# Altium PCB Room02.PcbDoc
Units mil, origin at the board's own origin, x right, y up, seen from the top; angles counter-clockwise.
Board outline 3779.53 x 3149.61 mil, 2 copper layers (Top Layer, Bottom Layer); 97 components, 89 nets, 403 pads, 109 vias.
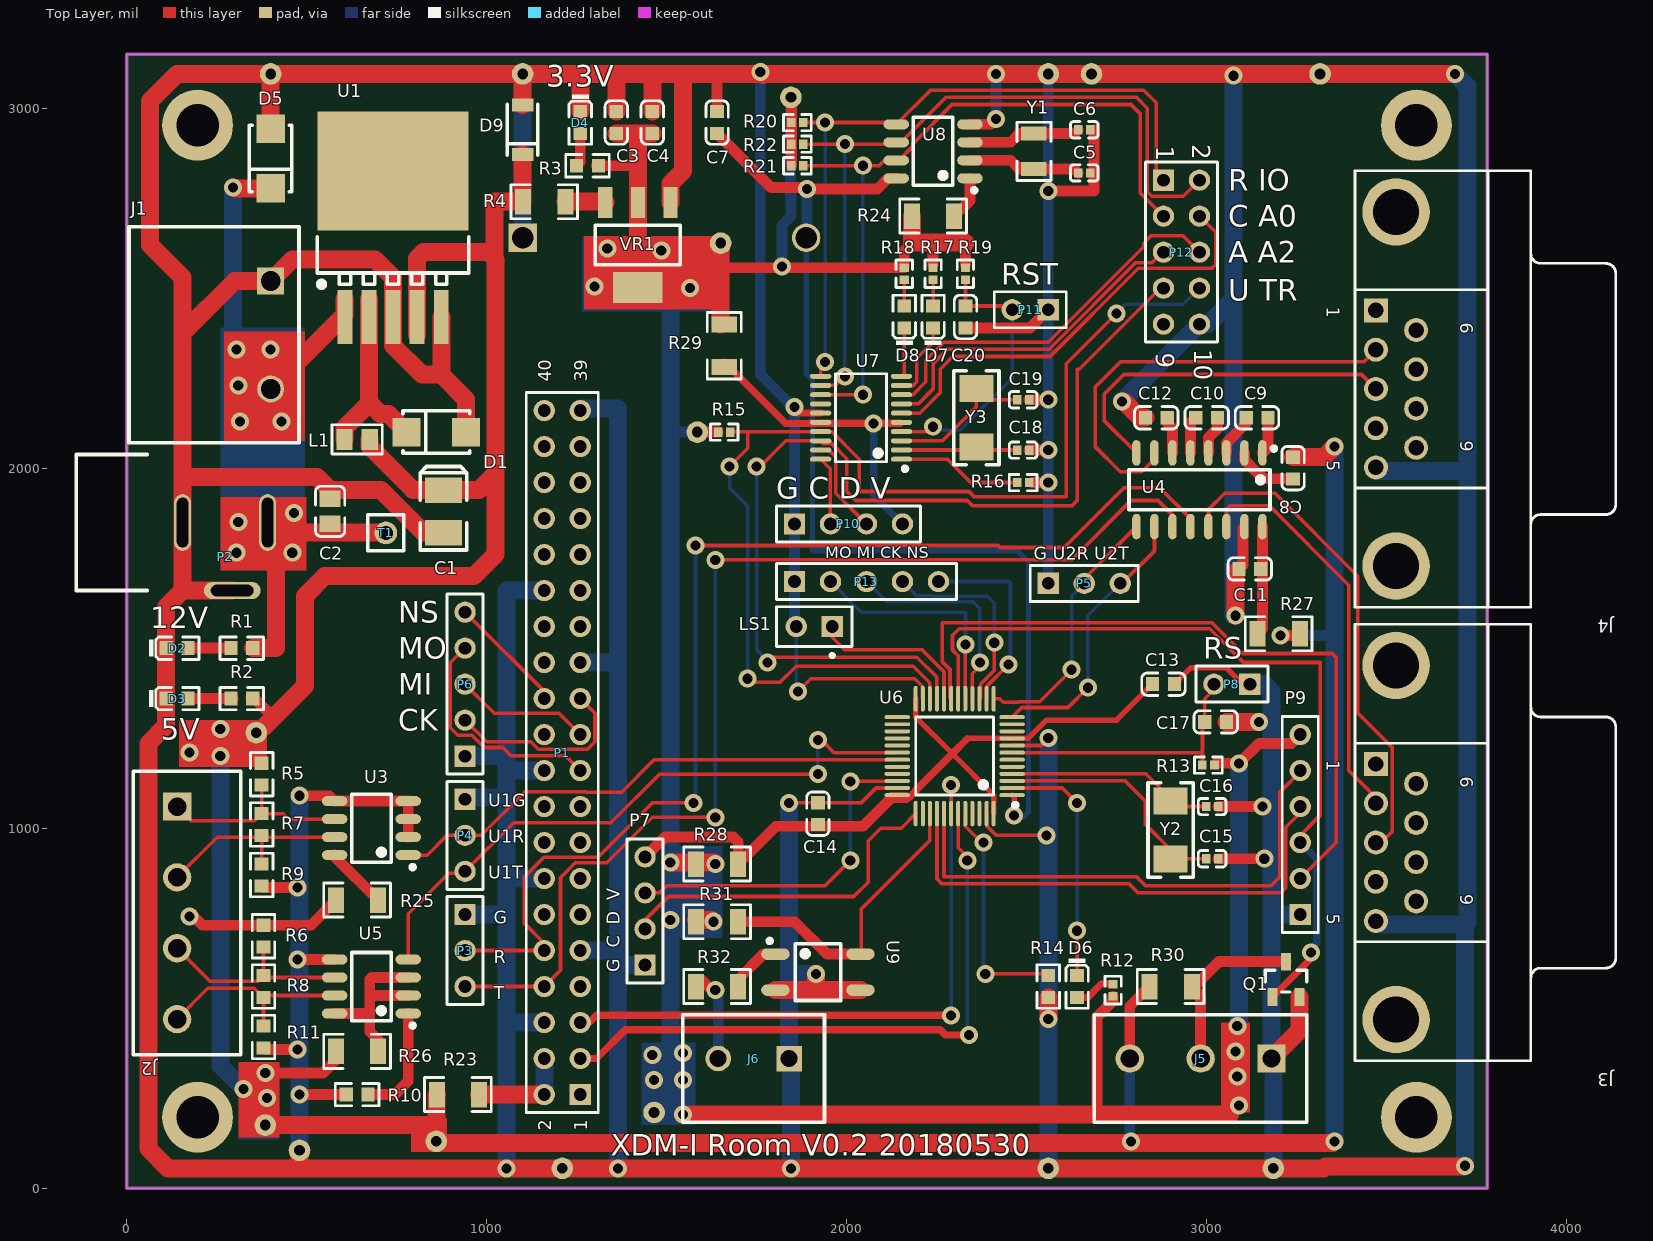
[diagram p0: Top Layer view]
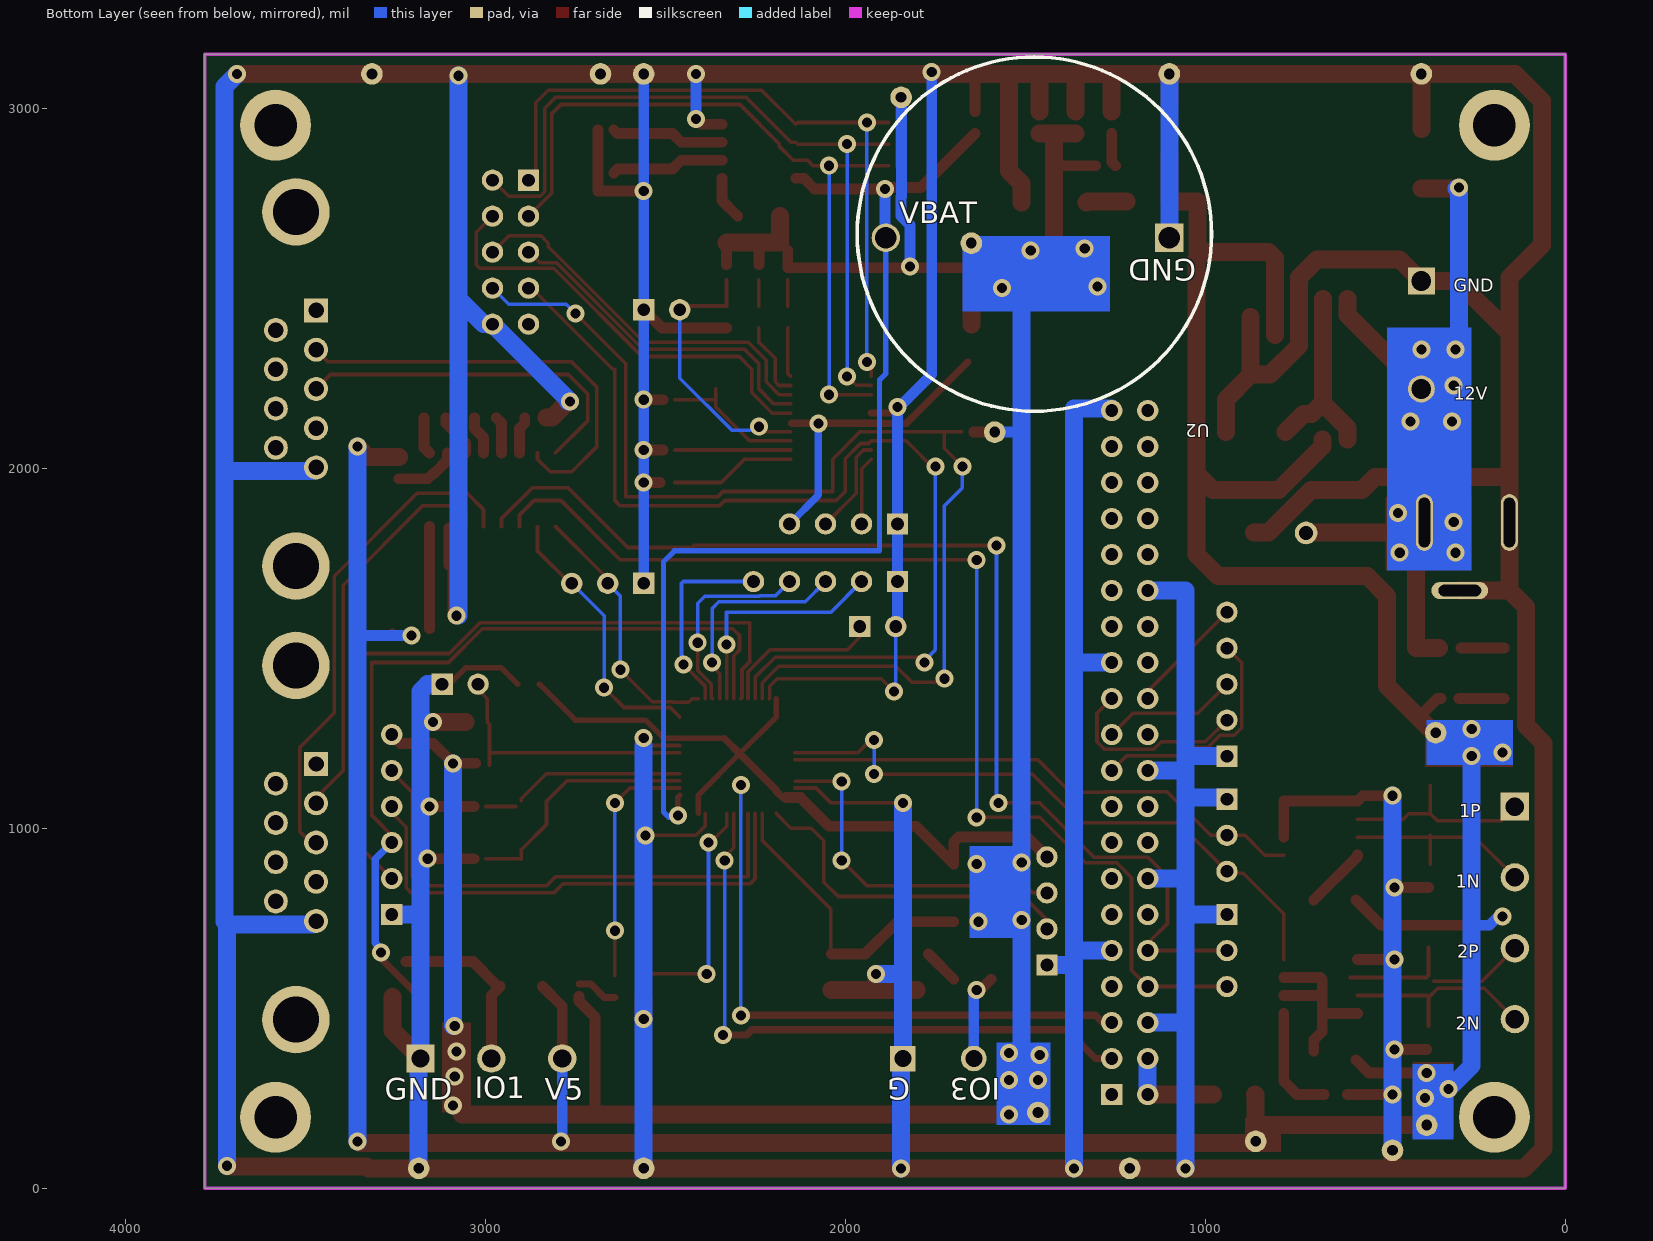
[diagram p1: Bottom Layer view, seen from below]
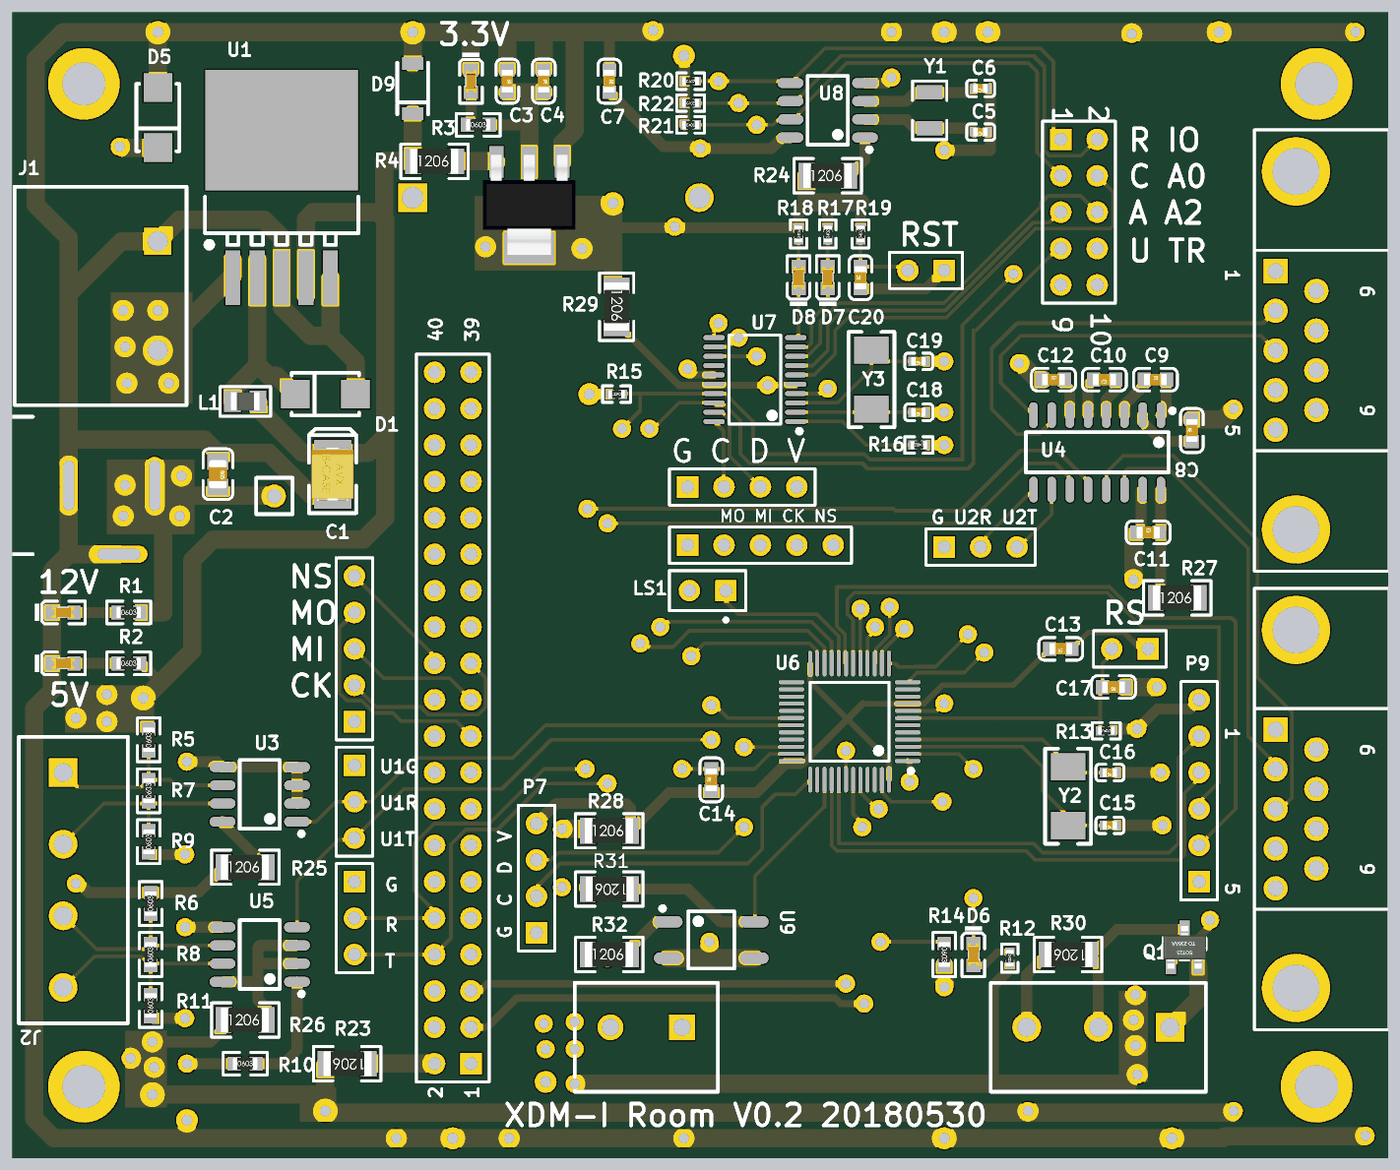
[diagram p2: 3D render of the assembled board from above, using the file's embedded part models]

## Layer stack, top to bottom
Top Layer: signal copper 1.4
Dielectric: dielectric 12.6, FR-4, Dk 4.8
Bottom Layer: signal copper 1.4

## Board outline
0,0 0,3149.61 3779.53,3149.61 3779.53,0

## Design rules (kind name [scope] priority, off if disabled: settings)
Clearance [All] p1: gap=6
DiffPairsRouting [All] p1: maxlimit=10 minlimit=10 mostfreqgap=10 maxuncoupledlength=500
HoleSize [All] p1: absolutevalues=TRUE maxlimit=236.22 minlimit=11.81 maxpercent=80.000 minpercent=20.000
MinimumSolderMaskSliver [All] p1: minsoldermaskwidth=6
PolygonConnect [All] p1: connectstyle=Relief reliefconductorwidth=10 reliefentries=4 polygonreliefangle="90 Angle"
RoutingVias [All] p1: holewidth=28 width=50 viastyle="Through Hole" minholewidth=28 minwidth=50 maxholewidth=28 maxwidth=50
SilkToSilkClearance [All] p1: silktosilkclearance=6
SilkscreenOverComponentPads [All] p1: minsilkscreentomaskgap=3
SolderMaskExpansion [All] p1: expansion=4
Width Width_V3.3 [InNet('V3.3')] p1: maxlimit=50 minlimit=10 preferedwidth=10
Width Width_V5 [InNet('V5')] p2: maxlimit=50 minlimit=10 preferedwidth=50
Width Width_GND [InNet('GND')] p3: maxlimit=50 minlimit=10 preferedwidth=50
Width [All] p4: maxlimit=50 minlimit=10 preferedwidth=10
23 further rules are at their usual default settings.

## Classes and differential pairs
component class mcu: C13 C14 C15 C16 C17 C18 C19 C20 D6 D7 D8 P5 P7 P8 P9 P10 P11 P12 P13 R12 R13 R14 R15 R16 R17 R18 R19 R28 R29 U6 U7 Y2 Y3
component class commu: C8 C9 C10 C11 C12 J2 J3 J4 P4 R5 R6 R7 R8 R9 R10 R11 R25 R26 R27 U3 U4 U5
component class Power: C1 C2 C3 C4 C7 D1 D2 D3 D4 D5 D9 J1 L1 P2 R1 R2 R3 R4 T1 U1 U2 VR1
component class other: C5 C6 J5 J6 LS1 Q1 R20 R21 R22 R24 R30 R31 R32 U8 U9 Y1
component class raspi: P1 P3 P6 R23
differential pair CON2: +CON2_P -CON2_N
differential pair CON1: +CON1_P -CON1_N

## Components (designator, comment, footprint, x,y, rotation, side; value= is the part's Value field where it differs from the comment)
C1 "100uF (107) ±10% 6.3V" CASE-B_3528 880,1880 r90 top
C2 "22uF (226) 20% 25V" 0805_C 565,1880 r270 top
C3 "10uF (106) 10% 10V" 0603_C 1360,2960 r270 top
C4 "100nF (104) 10% 50V" 0603_C 1460,2960 r270 top
C5 "12pF (120) 5% 50V" 0402_C 2660,2820 r180 top
C6 "12pF (120) 5% 50V" 0402_C 2660,2940 r180 top
C7 "10uF (106) 10% 10V" 0603_C 1640,2960 r270 top
C8 "1uF (105) 10% 50V" 0603_C 3240,2000 r90 top
C9 "1uF (105) 10% 50V" 0603_C 3140,2140 r0 top
C10 "1uF (105) 10% 50V" 0603_C 3000,2140 r180 top
C11 "1uF (105) 10% 50V" 0603_C 3120,1720 r0 top
C12 "1uF (105) 10% 50V" 0603_C 2860,2140 r0 top
C13 "100nF (104) 10% 50V" 0603_C 2880,1400 r180 top
C14 "10uF (106) 10% 10V" 0603_C 1920,1040 r90 top
C15 "20pF (200) 5% 50V" 0402_C 3015,915 r180 top
C16 "20pF (200) 5% 50V" 0402_C 3015,1060 r180 top
C17 "10uF (106) 10% 10V" 0603_C 3025,1295 r180 top
C18 "20pF (200) 5% 50V" 0402_C 2490,2050 r180 top
C19 "20pF (200) 5% 50V" 0402_C 2490,2190 r180 top
C20 "10uF (106) 10% 10V" 0603_C 2330,2420 r90 top
D1 "SS54" SMA(DO-214AC)_S1 860,2100 r0 top
D2 "绿灯 0603" 0603_LED_S1 140,1500 r0 top
D3 "蓝灯 0603" 0603_LED_S1 140,1360 r0 top
D4 "白灯 0603" 0603_LED_S1 1260,2960 r270 top
D5 "SS54" SMA(DO-214AC)_S1 400,2860 r90 top
D6 "蓝灯 0603" 0603_LED_S1 2640,560 r270 top
D7 "蓝灯 0603" 0603_LED_S1 2240,2420 r90 top
D8 "红灯 0603" 0603_LED_S1 2160,2420 r90 top
D9 "ZMM5V6" LL-34 1100,2940 r90 top
J1 "XK7.62-2P" XK7.62-2P 400,2520 r0 top
J2 "KF301-4P" KF301-4P 140,1060 r270 top
J3 "D Connector 9" DSUB1.385-2H9 3900,960 r270 top
J4 "D Connector 9" DSUB1.385-2H9 3900,2220 r270 top
J5 "KF301-3P" KF301-3P 3180,360 r180 top
J6 "KF301-2P" KF301-2P 1840,360 r180 top
L1 "100uH ±10%" 0805_L 640,2080 r0 top
LS1 "Bell" PIN2 1960,1560 r180 top
P1 "Header 20X2" HDR2X20 1260,260 r90 top
P2 "Header 3" DC005 -140,1660 r0 top
P3 "Header 3" HDR1X3 940,760 r270 top
P4 "Header 3" HDR1X3 940,1080 r270 top
P5 "Header 3" HDR1X3 2560,1680 r0 top
P6 "Header 5" HDR1X5 940,1200 r90 top
P7 "Header 4" HDR1X4 1440,620 r90 top
P8 "Header 2" HDR1X2 3120,1400 r180 top
P9 "Header 6" HDR1X6 3260,760 r90 top
P10 "Header 4" HDR1X4 1855,1845 r0 top
P11 "Header 2" HDR1X2 2560,2440 r180 top
P12 "Header 5X2" HDR2X5 2880,2800 r270 top
P13 "Header 5" HDR1X5 1855,1685 r0 top
Q1 "2N7002 7002" SOT-23(SOT-23-3) 3220,580 r270 top
R1 "20KΩ (2002) ±1%" 0603_R 320,1500 r0 top
R2 "10KΩ (1002) ±1%" 0603_R 320,1360 r0 top
R3 "10KΩ (1002) ±1%" 0603_R 1280,2840 r0 top
R4 "0Ω (0R0) ±1%" 1206_R 1160,2740 r0 top
R5 "10KΩ (1002) ±1%" 0603_R 375,1150 r90 top
R6 "10KΩ (1002) ±1%" 0603_R 380,700 r90 top
R7 "120Ω (1200) ±1%" 0603_R 375,1010 r90 top
R8 "120Ω (1200) ±1%" 0603_R 380,560 r90 top
R9 "10KΩ (1002) ±1%" 0603_R 375,870 r90 top
R10 "10KΩ (1002) ±1%" 0603_R 640,260 r0 top
R11 "10KΩ (1002) ±1%" 0603_R 380,420 r90 top
R12 "10KΩ (1002) ±1%" 0402_R 2740,550 r270 top
R13 "10KΩ (1002) ±1%" 0402_R 3005,1175 r0 top
R14 "100KΩ (1003) ±1%" 0603_R 2560,560 r270 top
R15 "100KΩ (1003) ±1%" 0402_R 1660,2100 r180 top
R16 "100KΩ (1003) ±1%" 0402_R 2490,1960 r180 top
R17 "10KΩ (1002) ±1%" 0402_R 2240,2540 r90 top
R18 "10KΩ (1002) ±1%" 0402_R 2160,2540 r90 top
R19 "10KΩ (1002) ±1%" 0402_R 2330,2540 r90 top
R20 "10KΩ (1002) ±1%" 0402_R 1863.27,2960 r0 top
R21 "10KΩ (1002) ±1%" 0402_R 1863.27,2840 r0 top
R22 "10KΩ (1002) ±1%" 0402_R 1863.27,2900 r0 top
R23 "0Ω (0R0) ±1%" 1206_R 920,260 r180 top
R24 "0Ω (0R0) ±1%" 1206_R 2240,2700 r0 top
R25 "0Ω (0R0) ±1%" 1206_R 640,800 r0 top
R26 "0Ω (0R0) ±1%" 1206_R 640,380 r0 top
R27 "0Ω (0R0) ±1%" 1206_R 3200,1540 r0 top
R28 "0Ω (0R0) ±1%" 1206_R 1640,900 r0 top
R29 "0Ω (0R0) ±1%" 1206_R 1660,2340 r270 top
R30 "10KΩ (1002) ±1%" 1206_R 2900,560 r180 top
R31 "10KΩ (1002) ±1%" 1206_R 1640,740 r180 top
R32 "1KΩ (1001) ±1%" 1206_R 1640,560 r0 top
T1 "TP1" TP1 720,1820 r0 top
U1 "LM2576SX-5.0" TO-263-5 740,2420 r270 top
U2 "BAT" BAT2032 1100,2640 r0 bottom
U3 "SN75176BDR" SOIC-8_150mil 680,1000 r90 top
U4 "MAX232ESE" SOIC-16_150mil 2980,1940 r180 top
U5 "SN75176BDR" SOIC-8_150mil 680,560 r90 top
U6 "STM32F103C8T6" LQFP-48_7x7x05P 2300,1200 r90 top
U7 "STM32F030F4P6" TSSOP-20 2040,2140 r90 top
U8 "DS1302Z+T&R" SOIC-8_150mil 2240,2880 r90 top
U9 "EL357N(B)(TA)-G" SOP-4_P2.54 1920,600 r0 top
VR1 "AMS1117-3.3" SOT-223 1420,2620 r90 top
Y1 "32.768KHz ±20ppm 12.5pF" "SMD-3215_2P FC - 135" 2520,2880 r90 top
Y2 "8MHz ±20ppm 20pF" SMD-5032_2P 2900,995 r90 top
Y3 "8MHz ±20ppm 20pF" SMD-5032_2P 2360,2140 r90 top

## Footprints (in the part's own frame and the unit in brackets; to place one, negate y for a bottom-side part, rotate by r counter-clockwise, add the part's x,y. Pads: shape width x height; smd on the part's side, far side on the other; paste and mask are expansions set on the pad)
0402_C [mm]
  rect 0.6x0.65 smd mask+0.051: 1(-0.425,0) 2(0.425,0)
  silkscreen extent -0.98,-0.58 0.98,0.58, body extent -0.48,-0.3 0.52,0.3, height 0.2
0402_R [mm]
  rect 0.6x0.65 smd mask+0.051: 1(-0.425,0) 2(0.425,0)
  silkscreen extent -0.98,-0.58 0.98,0.58, body extent -0.57,-0.27 0.58,0.28, height 0.41
0603_C [mm]
  rect 0.93x0.98 smd: 1(-0.77,0) 2(0.77,0)
  silkscreen extent -1.54,-0.79 1.54,0.79, body extent -0.8,-0.4 0.8,0.4, height 0.3
0603_LED_S1 [mm]
  rect 0.93x0.98 smd: A(0.77,0) K(-0.77,0)
  silkscreen extent -1.98,-0.79 1.54,0.79, body extent -0.8,-0.4 0.8,0.4, height 0.6
0603_R [mm]
  rect 0.93x0.98 smd: 1(-0.77,0) 2(0.77,0)
  silkscreen extent -1.53,-0.79 1.54,0.79, body extent -0.85,-0.4 0.85,0.4, height 0.56
0805_C [mm]
  rect 1.16x1.47 smd: 1(-0.89,0) 2(0.89,0)
  silkscreen extent -1.77,-1.04 1.77,1.04, body extent -1,-0.63 1,0.63, height 0.77
0805_L [mm]
  rect 1.16x1.47 smd: 1(-0.89,0) 2(0.89,0)
  silkscreen extent -1.77,-1.03 1.77,1.03, body extent -1.02,-0.64 1.03,0.64, height 0.6
1206_R [mm]
  rect 1.13x1.8 smd: 1(-1.49,0) 2(1.49,0)
  silkscreen extent -2.35,-1.2 2.35,1.2, body extent -1.7,-0.86 1.65,0.87, height 0.85
BAT2032 [mm]
  rect 2x2 hole 1.5: 1(0,0)
  round 2 hole 1.5: 2(20,0)
  silkscreen extent -2.97,-12.75 22.02,12.24
CASE-B_3528 [mm]
  rect 1.8x2.6 smd: 1(1.5,0) 2(-1.5,0)
  silkscreen extent -2.73,-1.65 3.16,1.65, body extent -1.85,-1.47 1.85,1.46, height 2.03
DC005 [mm]
  oval 1.2x4 hole 0.8 slot 3.5 at 90 deg: 1(13.5,4.8) 3(7.5,4.8)
  oval 4x1.2 hole 0.8 slot 3 at 0 deg: 2(11,0)
  silkscreen extent 0,0 5,9.6
DSUB1.385-2H9 [mm] "Connector; D Subminiature; 9 Position; Right Angle; Pitch 1.385 mm"
  rect 1.69x1.69 hole 1.09: 1(-5.54,-10.92)
  round 1.69 hole 1.09: 2(-2.77,-10.92) 3(0,-10.92) 4(2.77,-10.92) 5(5.54,-10.92) 6(-4.155,-8.08) 7(-1.385,-8.08) 8(1.385,-8.08) 9(4.155,-8.08)
  round 4.76 hole 3.26: 10(-12.495,-9.5) 11(12.495,-9.5)
  silkscreen extent -15.4,-12.4 15.4,6
HDR1X2 [mm] "Connector; Header; 2 Position"
  rect 1.5x1.5 hole 0.9: 1(0,0)
  round 1.5 hole 0.9: 2(2.54,0)
  silkscreen extent -1.27,-1.27 3.81,1.27
HDR1X3 [mm] "Connector; Header; 3 Position"
  rect 1.5x1.5 hole 0.9: 1(0,0)
  round 1.5 hole 0.9: 2(2.54,0) 3(5.08,0)
  silkscreen extent -1.27,-1.27 6.35,1.27
HDR1X4 [mm] "Connector; Header; 4 Position"
  rect 1.5x1.5 hole 0.9: 1(0,0)
  round 1.5 hole 0.9: 2(2.54,0) 3(5.08,0) 4(7.62,0)
  silkscreen extent -1.27,-1.27 8.89,1.27
HDR1X5 [mm] "Connector; Header; 5 Position"
  rect 1.5x1.5 hole 0.9: 1(0,0)
  round 1.5 hole 0.9: 2(2.54,0) 3(5.08,0) 4(7.62,0) 5(10.16,0)
  silkscreen extent -1.27,-1.27 11.43,1.27
HDR1X6 [mm] "Connector; Header; 6 Position"
  rect 1.5x1.5 hole 0.9: 1(0,0)
  round 1.5 hole 0.9: 2(2.54,0) 3(5.08,0) 4(7.62,0) 5(10.16,0) 6(12.7,0)
  silkscreen extent -1.27,-1.27 13.97,1.27
HDR2X5 [mm] "Connector; Header; 5x2 Position"
  rect 1.5x1.5 hole 0.9: 1(0,0)
  round 1.5 hole 0.9: 2(0,2.54) 3(2.54,0) 4(2.54,2.54) 5(5.08,0) 6(5.08,2.54) 7(7.62,0) 8(7.62,2.54) 9(10.16,0) 10(10.16,2.54)
  silkscreen extent -1.27,-1.27 11.43,3.81
HDR2X20 [mm] "Connector; Header; 20x2 Position"
  rect 1.5x1.5 hole 0.9: 1(0,0)
  round 1.5 hole 0.9: 2(0,2.54) 3(2.54,0) 4(2.54,2.54) 5(5.08,0) 6(5.08,2.54) 7(7.62,0) 8(7.62,2.54) 9(10.16,0) 10(10.16,2.54) 11(12.7,0) 12(12.7,2.54) 13(15.24,0) 14(15.24,2.54) 15(17.78,0) 16(17.78,2.54) 17(20.32,0) 18(20.32,2.54) 19(22.86,0) 20(22.86,2.54) 21(25.4,0) 22(25.4,2.54) 23(27.94,0) 24(27.94,2.54) 25(30.48,0) 26(30.48,2.54) 27(33.02,0) 28(33.02,2.54) 29(35.56,0) 30(35.56,2.54) 31(38.1,0) 32(38.1,2.54) 33(40.64,0) 34(40.64,2.54) 35(43.18,0) 36(43.18,2.54) 37(45.72,0) 38(45.72,2.54) 39(48.26,0) 40(48.26,2.54)
  silkscreen extent -1.27,-1.27 49.53,3.81
KF301-2P [mm]
  rect 1.8x1.8 hole 1.2: 1(0,0)
  round 1.8 hole 1.2: 2(5,0)
  silkscreen extent -2.5,-3.1 7.5,4.5
KF301-3P [mm]
  rect 2x2 hole 1.3: 1(0,0)
  round 2 hole 1.3: 2(5,0) 3(10,0)
  silkscreen extent -2.5,-3.1 12.5,4.5
KF301-4P [mm]
  rect 2x2 hole 1.3: 1(0,0)
  round 2 hole 1.3: 2(5,0) 3(10,0) 4(15,0)
  silkscreen extent -2.5,-3.1 17.5,4.5
LL-34 [mm]
  rect 0.9x1.5 smd: 1(1.75,0) 2(-1.75,0)
  silkscreen extent -1.8,-1.07 1.8,1.07
LQFP-48_7x7x05P [mm]
  oval 0.28x1.8 smd mask+0.051: 1(-2.75,-4.05) 2(-2.25,-4.05) 3(-1.75,-4.05) 4(-1.25,-4.05) 5(-0.75,-4.05) 6(-0.25,-4.05) 7(0.25,-4.05) 8(0.75,-4.05) 9(1.25,-4.05) 10(1.75,-4.05) 11(2.25,-4.05) 12(2.75,-4.05) 25(2.75,4.05) 26(2.25,4.05) 27(1.75,4.05) 28(1.25,4.05) 29(0.75,4.05) 30(0.25,4.05) 31(-0.25,4.05) 32(-0.75,4.05) 33(-1.25,4.05) 34(-1.75,4.05) 35(-2.25,4.05) 36(-2.75,4.05)
  oval 1.8x0.28 smd mask+0.051: 13(4.05,-2.75) 14(4.05,-2.25) 15(4.05,-1.75) 16(4.05,-1.25) 17(4.05,-0.75) 18(4.05,-0.25) 19(4.05,0.25) 20(4.05,0.75) 21(4.05,1.25) 22(4.05,1.75) 23(4.05,2.25) 24(4.05,2.75) 37(-4.05,2.75) 38(-4.05,2.25) 39(-4.05,1.75) 40(-4.05,1.25) 41(-4.05,0.75) 42(-4.05,0.25) 43(-4.05,-0.25) 44(-4.05,-0.75) 45(-4.05,-1.25) 46(-4.05,-1.75) 47(-4.05,-2.25) 48(-4.05,-2.75)
  silkscreen extent -3.6,-4.43 2.75,2.75
PIN2 [mm] "Photosensitive Diode; 2 Leads"
  rect 1.5x1.5 hole 0.9: 1(0,0)
  round 1.5 hole 0.9: 2(2.54,0)
  silkscreen extent -1.4,-1.4 3.94,2.17
SMA(DO-214AC)_S1 [mm]
  rect 2x2 smd: 1(2.1,0) 2(-2.1,0)
  silkscreen extent -2.35,-1.5 2.35,1.5
"SMD-3215_2P FC - 135" [mm]
  rect 1x1.8 smd: 1(-1.25,0) 2(1.25,0)
  silkscreen extent -2.05,-1.2 2.05,1.2
SMD-5032_2P [mm]
  rect 1.9x2.4 smd: 1(-2.05,0) 2(2.05,0)
  silkscreen extent -3.33,-1.6 3.33,1.6
SOIC-8_150mil [mm]
  oval 0.7x1.8 smd: 1(-1.905,-2.6) 2(-0.635,-2.6) 3(0.635,-2.6) 4(1.905,-2.6) 5(1.905,2.6) 6(0.635,2.6) 7(-0.635,2.6) 8(-1.905,2.6)
  silkscreen extent -2.9,-3.05 2.4,1.4
SOIC-16_150mil [mm]
  oval 0.6x1.8 smd: 1(-4.445,-2.6) 2(-3.175,-2.6) 3(-1.905,-2.6) 4(-0.635,-2.6) 5(0.635,-2.6) 6(1.905,-2.6) 7(3.175,-2.6) 8(4.445,-2.6) 9(4.445,2.6) 10(3.175,2.6) 11(1.905,2.6) 12(0.635,2.6) 13(-0.635,2.6) 14(-1.905,2.6) 15(-3.175,2.6) 16(-4.445,2.6)
  silkscreen extent -5.4,-3.05 4.97,1.4
SOP-4_P2.54 [mm]
  oval 2x0.8 smd: 1(-3,1.27) 2(-3,-1.27) 3(3,-1.27) 4(3,1.27)
  silkscreen extent -3.55,-2 1.6,2.35
SOT-23(SOT-23-3) [mm]
  rect 1.25x0.7 smd: 1(1.25,-0.95) 2(1.25,0.95) 3(-1.25,0)
  silkscreen extent -0.65,-1.46 0.9,1.46, body extent -1.5,-1.5 1.5,1.5, height 1.3
SOT-223 [mm]
  rect 2.2x1 smd: 1(3,-2.3) 2(3,0) 3(3,2.3)
  rect 2.2x3.5 smd: 2(-3,0)
  silkscreen extent -1.4,-3 1.4,3, body extent -3.49,-3.24 3.49,3.24, height 1.64
TO-263-5 [mm]
  rect 8.4x10.65 smd: 0(-10.3,0)
  rect 3.8x1.05 smd: 1(0,-3.4) 2(0,-1.7) 3(0,0) 4(0,1.7) 5(0,3.4)
  silkscreen extent -5.65,-5.35 -2.1,5.35
TP1 [mm] "Test Point 1"
  round 1.6 hole 1: 1(0,0)
  silkscreen extent -1.27,-1.27 1.27,1.27
TSSOP-20 [mm]
  oval 0.35x1.5 smd: 1(-2.925,-2.85) 2(-2.275,-2.85) 3(-1.625,-2.85) 4(-0.975,-2.85) 5(-0.325,-2.85) 6(0.325,-2.85) 7(0.975,-2.85) 8(1.625,-2.85) 9(2.275,-2.85) 10(2.925,-2.85) 11(2.925,2.85) 12(2.275,2.85) 13(1.625,2.85) 14(0.975,2.85) 15(0.325,2.85) 16(-0.325,2.85) 17(-0.975,2.85) 18(-1.625,2.85) 19(-2.275,2.85) 20(-2.925,2.85)
  silkscreen extent -3.75,-3.25 3.1,1.8
XK7.62-2P [mm]
  rect 1.9x1.9 hole 1.4: 1(0,0)
  round 1.9 hole 1.4: 2(0,-7.62)
  silkscreen extent -10,-11.43 2,3.81

## Part data
C1: library part "3528 100uF (107) 10% 6.3V", "钽电容"
C2: library part "0805 22uF (226) 20% 25V", "贴片电容"
C3 C7 C14 C17 C20: library part "0603 10uF (106) 10% 10V", "贴片电容"
C4 C13: library part "0603 100nF (104) 10% 50V", "贴片电容"
C5 C6: library part "0402 12pF (120) 5% 50V", "贴片电容"
C8 C9 C10 C11 C12: library part "0603 1uF (105) 10% 50V", "贴片电容"
C15 C16 C18 C19: library part "0402 20pF (200) 5% 50V", "贴片电容"
D1 D5: library part "SMA(DO-214AC) SS54", "二极管"
D2: library part "0603 绿灯", "发光二极管"
D3 D6 D7: library part "0603 蓝灯", "发光二极管"
D4: library part "0603 白灯", "发光二极管"
D8: library part "0603 红灯", "发光二极管"
D9: library part "LL-34 ZMM5V6", "稳压二极管"
J3 J4: "Receptacle Assembly, 9 Position, Right Angle"
L1: library part "0805 100uH 10%", "贴片电感"
LS1: "Electrical Bell"
P1: "Header, 20-Pin, Dual row"
P2 P3 P4 P5: "Header, 3-Pin"
P6 P13: "Header, 5-Pin"
P7 P10: "Header, 4-Pin"
P8 P11: "Header, 2-Pin"
P9: "Header, 6-Pin"
P12: "Header, 5-Pin, Dual row"
Q1: "MOS(场效应管)"
R1: library part "0603 20KΩ (2002) 1%", "贴片电阻"
R2 R3 R5 R6 R9 R10 R11: library part "0603 10KΩ (1002) 1%", "贴片电阻"
R4 R23 R24 R25 R26 R27 R28 R29: library part "1206 0Ω (0R0) 1%", "贴片电阻"
R7 R8: library part "0603 120Ω (1200) 1%", "贴片电阻"
R12 R13 R17 R18 R19 R20 R21 R22: library part "0402 10KΩ (1002) 1%", "贴片电阻"
R14: library part "0603 100KΩ (1003) 1%", "贴片电阻"
R15 R16: library part "0402 100KΩ (1003) 1%", "贴片电阻"
R30 R31: library part "1206 10KΩ (1002) 1%", "贴片电阻"
R32: library part "1206 1KΩ (1001) 1%", "贴片电阻"
U1: library part LM2576SX-5.0_[C34465], "DC-DCоƬ"
U2: library part BAT2032
U3 U5: library part SN75176BDR_[C7063], "RS-485/RS-422"
U4: library part MAX232ESE_[C26860], "RS232"
U6 U7: "ARM"
U8: library part DS1302Z+T&R_[C8959], "实时时钟"
U9: library part EL357N(B)(TA)-G_[C6649], "贴片光耦"
VR1: library part "SOT-223 AMS1117-3.3", "低压差线性稳压(LDO)"
Y1: library part "SMD-3215_2P 32.768KHz 20ppm 12.5pF", "贴片晶振"
Y2 Y3: library part "SMD-5032_2P 8MHz 20ppm 20pF", "贴片晶振"

## Free pads (board coordinates)
  round 196.85 hole 118.11: 0(196.85,196.85) 1(196.85,2952.76) 2(3582.68,2952.76) 3(3582.68,196.85)
  round 60 hole 30: 0(1465,210) 0(1585,2100) 0(1650,2625) 0(2560,3095) 1(400,3095) 1(1210,55) 1(1845,3030) 1(2560,55) 2(1100,3095) 2(3185,55) 3(860,130) 3(2680,3095) 4(360,1265) 4(3315,3095) 6(385,175) 8(480,105)

## Via types
v1: diameter 50, hole 28, Top Layer to Bottom Layer, 109 vias

## Nets (pads, with @x,y where several pads share a name; then routed paths per layer and width w, separated by ;. In a path a pad name is that pad's centre, name@x,y a point inside that pad or via, vN(x,y) a via of type N, cw(c..) or ccw(c..) an arc to the next point about the centre after c; other vN are vias at no path point)
ADC2_IN0: U6.10
ADC2_IN1: U6.11
BEEP: LS1.1 U6.20 | length 455.1
  Top Layer w10: LS1.1 1960,1530 1995,1495 2210,1495 2270.47,1434.53 U6.20
BOOT0: R14.1 U6.44 | length 674.4
  Top Layer w10: U6.44 2329.53,1005.47 2360,975 2370,960 v1(2380,960) v1@2385,965 ; v1@2370,595 R14.1@2555.31,595
  Bottom Layer w10: v1@2370,595 v1@2371,596 ; v1@2371,959 2370,960 v1(2380,960) v1@2380,597
  other v1: 2385,595
C1+: C9.2 U4.1 | length 104
  Top Layer w30: U4.1 3170,2057.36 3170,2139.69 C9.2
C1-: C9.1 U4.3 | length 120.3
  Top Layer w30: U4.3 3055,2070 3109.68,2124.68 C9.1
C2+: C10.1 U4.4 | length 108.1
  Top Layer w30: U4.4 3005,2085 3030.31,2110.31 C10.1
C2-: C10.2 U4.5 | length 103.7
  Top Layer w30: U4.5 2955,2125.32 C10.2
CON1_N: J2.2 R7.1 R9.2 U3.7 | length 766
  Top Layer w10: J2.2 251.85,975 R7.1@375,975 ; R9.2 R7.1@375,975 ; R7.1 R7.1@375,975 ; R7.1@375,975 U3.7 R7.1@375,975
CON1_P: J2.1 R5.1 R7.2 U3.6 | length 548.3
  Top Layer w10: J2.1 180,1020 354.68,1020 R7.2 ; R5.1 R7.2 ; U3.6 450,1025 434.68,1040.32 R7.2
CON2_N: J2.4 R8.1 R11.2 U5.7 | length 565.1
  Top Layer w10: J2.4 225.55,555 295,555 354.69,555 R8.1 ; R11.2 R8.1 ; U5.7 385.31,535 R8.1
CON2_P: J2.3 R6.1 R8.2 U5.6 | length 554.2
  Top Layer w10: J2.3 231.3,575 295,575 R8.2@364.68,575 ; R8.2 R6.1 ; R8.2@385.32,585 U5.6 U5.6@597.64,585
DS1302_IO: P12.2 R22.2 U7.12 U8.6 | length 2253.2
  Top Layer w10: U7.12 1928.23,2230 1970,2230 v1(1995,2255) ; U8.6@2132.64,2900 v1(1995,2900) ; U8.6 2151,2905 2276,3030 2805,3030 2835,3000 2835,2767.63 2847.63,2755 2935,2755 P12.2 ; v1(1995,2900) R22.2 v1(1995,2900)
  Bottom Layer w10: v1(1995,2255) v1(1995,2900)
DS1302_RSTN: P12.1 R20.2 U7.11 U8.5 | length 2022
  Top Layer w10: U7.11 1927.8,2282.8 v1(1940,2295) ; U8.5@2132.64,2960 v1(1940,2960) ; U8.5 2232.64,3050 2825,3050 2860,3015 2860,2820 P12.1 ; v1(1940,2960) R20.2 v1(1940,2960)
  Bottom Layer w10: v1(1940,2295) v1(1940,2960)
DS1302_SCK: P12.3 R21.2 U7.13 U8.7 | length 2090.9
  Top Layer w10: R21.2 v1(2045,2840) 2090,2840 2105,2855 U8.7 2144.33,2855 2184.07,2894.74 2184.07,2901.43 2292.64,3010 2790,3010 2815,2985 2815,2765 P12.3 ; U7.13 v1(2045,2203.98)
  Bottom Layer w10: v1@2038.98,2203.98 v1(2045,2203.98) v1(2045,2840)
DS1302_X1: C5.2 U8.2 Y1.1 | length 315.4
  Top Layer w30: U8.2 2455.79,2855 2480,2830.79 Y1.1 2632.48,2830.79 C5.2
DS1302_X2: C6.2 U8.3 Y1.2 | length 315.4
  Top Layer w30: U8.3 2455.79,2905 2480,2929.21 Y1.2 2632.48,2929.21 C6.2
GND: C1.2 C2.1 C3.1 C4.1 C5.1 C6.1 C7.1 C11.1 C12.1 C13.1 C14.2 C15.1 C16.1 C17.1 C18.1 C19.1 C20.1 D1.1 D2.K D3.K D4.K D5.1 D9.1 J1.1 J3.5 J4.5 J5.1 J6.1 LS1.2 P1.6 P1.9 P1.14 P1.20 P1.25 P1.30 P1.39 P2.2 P2.3 P3.1 P4.1 P5.1 P6.1 P7.1 P8.1 P9.1 P10.1 P11.1 P12.10 P13.1 pad.0@2560,3095 pad.1@400,3095 pad.1@1210,55 pad.1@2560,55 pad.2@1100,3095 pad.2@3185,55 pad.3@2680,3095 pad.4@3315,3095 pad.8 Q1.2 R9.1 R10.1 R11.1 R14.2 R16.1 U1.3 U1.5 U2.1 U3.2 U3.3 U3.4 U3.5 U4.15 U5.5 U6.8 U6.23 U6.35 U6.47 U7.15 U8.4 U9.2 U9.3 VR1.1 | length 36723.5
  Top Layer w10: v1(1840,1070) 2040,1070 2081.42,1111.42 U6.35 ; v1(1865,1380) 1900,1415 2189.45,1415 2210.23,1394.22 2210.23,1360.63 U6.23 ; U6.47 2388.58,1006.42 2415,980 v1(2555,980) ; U6.8 2539.53,1229.53 v1(2560,1250)
  Top Layer w15: C13.1 2955.31,1445 3055,1445 3100,1400 P8.1
  Top Layer w20: v1@1857.2,2152.8 U7.15
  Top Layer w30: R9.1@379.69,835 v1(475,835) v1@480,835 ; R11.1@384.69,385 v1(475,385) v1@480,385 ; v1(480,260) R10.1@604.69,260 ; v1@480,635 v1(475,635) U5.5 ; v1(480,1090) 562.64,1090 U3.5 U3.4 U3.3 U3.2 ; C7.1 1640,3095 ; C20.1 2330.21,2389.47 2509.47,2389.47 P11.1 ; U8.4 2400,2955 v1(2415,2970) ; C18.1 v1(2560,2050) ; C19.1 v1(2560,2190) ; R16.1@2515,1960 v1(2560,1960) ; v1(2560,2770) 2686.73,2770 C6.1@2686.73,2940 ; C15.1 v1(3160,915) ; C16.1 v1(3155,1060) ; C11.1@3101.01,1731.32 U4.15@3101.01,1833.65
  Top Layer w50: 155.55,1660 P2.2 ; D5.1 pad.1@400,3095 ; pad.8 480,55 ; C1.2@865,1820.95 824.06,1820.95 705.95,1939.06 565,1939.06 529.06,1975 155,1975 ; U1.5 873.86,2260 ; D1.1 942.68,2191.18 873.86,2260 ; D9.1 pad.2@1100,3095 ; D4.K 1260,3090 ; C3.1 1360,3095 ; C4.1 1460,3095 ; VR1.1 1510.55,2790.55 1545,2825 1545,3095 ; v1@1767.5,3092.5 v1@1765,3095 ; U9.2 1905,550 ; v1(1915,595) 1915,560 1905,550 ; U9.3 1905,550 ; v1(2560,470) R14.2 ; v1(2765,2185) 2770,2185 2815,2140 C12.1 ; C17.1 v1(3145,1295) ; v1(3080,1590) C11.1@3080,1710.31 ; J5.1 3257.4,437.4 Q1.2 ; 3325,55 3185,55 2560,55 v1(1845,55) v1(1365,55) 1210,55 v1(1055,55) 480,55 ; 3330,60 3715,60 v1(3717.15,62.15) ; v1(3690,3095) 3315,3095 2680,3095 2560,3095 v1(2415,3095) v1@1765,3095 ; 155,1975 155,2375 ; 155,1975 155,1849.25 P2.3 155.28,1660.28 109.69,1614.69 D2.K D3.K 109.69,1285.31 60,1235.63 60,110 115,55 480,55 ; 155,2375 300,2520 J1.1 460,2580 690,2580 740,2530 U1.3 740,2340 820,2260 873.86,2260 ; 155,2375 155,2530 65,2620 65,3020 140,3095 pad.1@400,3095 ; pad.1@400,3095 pad.2@1100,3095 ; pad.2@1100,3095 1360,3095 ; 1360,3095 1460,3095 ; 1460,3095 1545,3095 ; 1545,3095 1640,3095 v1@1760,3095 ; v1@1760,3095 v1(1760,3100) v1@1765,3095 ; v1@1760,3095 v1@1765,3095
  Bottom Layer w10: LS1.2 1860,1385 v1(1865,1380)
  Bottom Layer w30: v1@1767.5,3092.5 1760,3085 1760,2260 v1@1855,2165 ; LS1.2@1855,1565 P13.1 P10.1 v1@1855,2165 ; v1@1857.2,2152.8 v1@1855,2165 ; v1(2415,2970) v1(2415,3095) ; P5.1 v1(2560,2050) v1(2560,2190) P11.1 v1(2560,2770) 2560,3095 pad.0@2560,3100
  Bottom Layer w50: v1(475,385) v1@480,385 ; v1(475,635) v1@480,635 ; v1(475,835) v1@480,835 ; pad.8 v1(480,260) v1@480,385 ; v1(480,1090) v1@480,835 ; P3.1 1055,760 ; P4.1@940,1085 1055,1085 ; P6.1 1050,1200 ; v1(1055,55) 1055,460 ; 1060,860 P1.14 ; U2.1 pad.2@1100,3095 ; P1.6@1155,460 1055,460 ; P1.20 1055,1160 ; P1.30 1055,1660 1055,1160 ; P1.9 1360,660 ; P1.25 1365,1460 ; P1.39@1260,2165 1365,2165 1365,1460 ; v1(1365,55) 1365,620 ; P7.1 1365,620 ; J6.1 1840,595 ; v1(1840,1070) 1840,595 ; v1(1845,55) J6.1@1845,360 ; v1(1915,595) 1840,595 ; pad.1@2560,55 v1(2560,470) v1@2560,1230 ; v1@2770,2185 v1(2765,2185) P12.10 3005,2400 3075,2470 ; v1@3075,1590 3075,2470 ; v1(3075,3090) 3075,2470 ; P8.1 3160,1400 3180,1380 3180,760 ; J5.1 3180,760 ; pad.2@3185,55 J5.1@3185,355 ; P9.1 3180,760 ; J3.5 3479.82,732.15 3717.15,732.15 ; J4.5 3479.82,1992.15 3722.85,1992.15 ; v1(3690,3095) 3725,3060 3725,740 3717.15,732.15 ; v1(3717.15,62.15) 3717.15,732.15 ; v1@480,385 v1@480,635 ; v1@480,635 v1@480,835 ; 1055,460 1055,760 ; 1055,760 1055,1085 ; 1055,1085 1055,1160 ; 1365,620 1365,1460
  other v1: 1855,2170
GR2S4: P1.22
I2C_SCL: P1.5 U6.42 | length 1768.3
  Top Layer w10: U6.42 v1(2290.16,1120)
  Top Layer w20: P1.5@1266,466 P1.5 1285,460 1305,480 v1(2290,480)
  Bottom Layer w10: v1@2285,1120 2285,1110 2290,1105 v1(2290,480)
I2C_SDA: P1.3 U6.43 | length 1761.2
  Top Layer w10: U6.43 2309.84,945.16 2325,930 2325,910 v1(2335,910)
  Top Layer w20: P1.3 1305,360 1385,440 2260,440 2275,425 v1(2340,425)
  Bottom Layer w10: v1@2335,430 2335,898 2324,909 2325,910 v1(2335,910)
IO1: J5.2 Q1.3 R30.1 | length 479.7
  Top Layer w30: R30.1 2983.15,535.51 J5.2 ; R30.1@2975,570 3034.21,629.21 Q1.3
IO1_103: P9.3 Q1.1 U6.18 | length 2265.7
  Top Layer w10: U6.18 2309.84,1479.25 2294,1495.09 2294,1535.46 2312.7,1554.16 3008.21,1554.16 3102.37,1460 3315,1460 3315,1035 P9.3@3250,970 ; P9.3 P9.3@3275,960
  Top Layer w20: Q1.1 v1@3290.91,639.1
  Bottom Layer w20: P9.3 3305.53,914.47 3305.53,680.53 3290,665 v1(3290,655)
IO2_103: P9.2 U6.19 | length 2022.4
  Top Layer w10: U6.19 2286.98,1362.62 2286.98,1440.64 2265,1462.63 2265,1570.16 3014.84,1570.16 3100,1485 3349,1485 3360,1474 3360,960 P9.2 P9.2@3258.94,860
  Bottom Layer w20: P9.2@3260,850 P9.2
IO3_103: R31.1 U6.39 U9.4 | length 845.2
  Top Layer w10: U9.4@2040,651.89 2040,775 2230,965 2231.1,965 U6.39
  Top Layer w30: R31.1 1855,740 1945,650 U9.4
IO4_103: P9.4 U6.40 | length 1414.6
  Top Layer w10: U6.40 2250.79,859.21 2265,845 2785,845 2810,820 3205,820 3219.47,834.47 3219.47,1002.63 3260,1043.15 P9.4
IO5_103: P9.5 U6.41 | length 1447.4
  Top Layer w10: U6.41 2270.47,865.47 2270.94,865 2805,865 2830,840 3178.47,840 3203.47,865 3203.47,1100.53 3260,1157.06 P9.5
J3R: J3.3 U4.13 | length 1383
  Top Layer w10: U4.13 3005,1885 3050,1930 3190,1930 3420,1700 3420,1320 3515,1225 3515,990 3485,960 J3.3
J3T: J3.2 U4.14 | length 1119.7
  Top Layer w10: U4.14 3055,1885 3065,1895 3175,1895 3395,1675 3395,1160.08 3470.08,1085 J3.2
J4R: J4.3 U4.8 | length 994.3
  Top Layer w10: U4.8 2715,2132.36 2715,2205 2770,2260 3430.08,2260 J4.3
J4T: J4.2 U4.7 | length 1214
  Top Layer w10: U4.7 2855,2025 2820,1990 2760,1990 2690,2060 2690,2225 2760,2295 3436.02,2295 J4.2
LED3_030: D7.K U7.9 | length 215.4
  Top Layer w10: U7.9 2184.57,2229.57 2195,2240 2195,2305 2240,2350 D7.K
LED4_030: D8.K U7.10 | length 137.8
  Top Layer w10: U7.10 2160,2262.95 D8.K
LED_103: D6.K U6.2 | length 677.4
  Top Layer w10: U6.2 2598.58,1111.42 v1(2640,1070) ; D6.K v1(2640,715)
  Bottom Layer w10: v1(2640,715) v1(2640,1070)
NetC8_1: C8.1 U4.2 | length 176.6
  Top Layer w30: U4.2 3105,2022.34 3141.41,1985.93 3144.07,1985.93 3159.68,1970.32 C8.1@3240,1970.32
NetC11_2: C11.2 R27.1 U4.16 | length 284
  Top Layer w30: R27.1@3155,1553.66 U4.16
NetC12_2: C12.2 U4.6 | length 103.7
  Top Layer w30: C12.2 2890.32,2124.68 2905,2110 U4.6
NetD2_A: D2.A R1.1 | length 119.7
  Top Layer w30: D2.A R1.1@290,1500
NetD3_A: D3.A R2.1 | length 124.7
  Top Layer w30: D3.A R2.1@295,1360
NetD4_A: D4.A R3.1 | length 94
  Top Layer w30: R3.1 1260,2850.31 D4.A
NetD6_A: D6.A R12.1 | length 115.3
  Top Layer w20: D6.A 2669.68,529.68 2706.73,566.73 R12.1
NetD7_A: D7.A R17.1 | length 73
  Top Layer w10: D7.A R17.1
NetD8_A: D8.A R18.1 | length 73
  Top Layer w10: D8.A R18.1
NetJ6_2: J6.2 R32.1 | length 245.8
  Top Layer w30: R32.1@1595,580 1625,550 v1(1635,550)
  Bottom Layer w30: v1(1635,550) 1643.15,541.85 J6.2
NetR4_2: R4.2 VR1.3 | length 111.6
  Top Layer w50: R4.2 1327.56,2740 VR1.3
NetR10_2: R10.2 U5.1 | length 315.2
  Top Layer w30: R10.2 745,260 782.36,297.36 U5.1
NetR16_2: R16.2 U7.1 | length 347.9
  Top Layer w10: U7.1 2280.16,2024.84 2345,1960 R16.2
NetR25_2: R25.2 U3.8 | length 175.1
  Top Layer w30: U3.8 577.64,921.02 R25.2
NetR26_2: R26.2 U5.2 U5.3 U5.8 | length 564
  Top Layer w30: U5.8 670,485 ; R26.2 698.66,411.34 675,435 675,535 ; U5.2 675,535 ; U5.3 680,585 675,580 ; 675,535 675,580 ; 675,535 675,580
NetR32_2: R32.2 U9.1 | length 99
  Top Layer w30: R32.2@1698.66,580 U9.1@1768.66,650
NRST: C17.2 P8.2 R13.1 U6.7 | length 767
  Top Layer w10: U6.7 2988.27,1209.84 ; R13.1 2988.27,1288.58 C17.2 2994.68,1359.68 3020,1385 P8.2
NRST_030: C20.2 P11.2 R19.1 U7.4 | length 776
  Top Layer w10: U7.4 2226.61,2101.61 v1(2240,2115) v1@2240,2105 ; R19.1 C20.2 P11.2@2449.69,2450.32
  Bottom Layer w10: v1(2240,2115) 2240,2105 2315,2105 2460,2250 P11.2
O_2576: D1.2 L1.1 U1.2 | length 553.8
  Top Layer w50: L1.1 604.96,2111.19 673.07,2179.3 ; U1.2@673.07,2470 U1.2 673.07,2181.96 704.83,2150.2 727.13,2150.2 D1.2
OSC32_IN: C15.2 U6.3 Y2.1 | length 681.1
  Top Layer w10: U6.3 2773.9,1131.1 2830,1075 2830,1010 2900,940 Y2.1 ; Y2.1@2900.71,915 C15.2
OSC32_OUT: C16.2 U6.4 Y2.2 | length 557.6
  Top Layer w10: U6.4 2830.79,1150.79 2900,1081.58 Y2.2 ; Y2.2@2915.71,1060 C16.2
OSC_IN: C18.2 U7.2 Y3.1 | length 321.2
  Top Layer w10: U7.2 2360,2050.43 2472.83,2050.43 C18.2
OSC_OUT: C19.2 U7.3 Y3.2 | length 405.7
  Top Layer w10: U7.3 2266.02,2076.02 2360,2170 Y3.2 ; Y3.2@2365,2190 C19.2
PA0: P12.4 U7.6 | length 1235.3
  Top Layer w10: U7.6 2202.8,2152.8 2260,2210 2260,2275 2295,2310 2565,2310 2810,2555 3015,2555 3025,2565 3025,2655 P12.4
PA1: P12.5 U7.7 | length 943.4
  Top Layer w10: U7.7 2198.39,2178.39 2240,2220 2240,2290 2280,2330 2562.37,2330 2803.37,2571 2848.63,2571 2877.63,2600 P12.5
PA2: P12.6 U7.8 | length 1070
  Top Layer w10: U7.8 2183.98,2203.98 2220,2240 2220,2300 2270,2350 2559.75,2350 2825,2615.25 2825,2625 2845,2645 2935,2645 P12.6
RU0RX: P1.10 P3.2 U4.12 | length 3216.1
  Top Layer w10: P3.2 P1.10 1160,680 1105,735 1105,865 1159.47,919.47 1309.47,919.47 1460,1070 v1(1575,1070) ; v1(1580,1785) 2420.39,1785 2425.92,1779.47 2604.47,1779.47 2770,1945 2870,1945 2955,1860 U4.12
  Bottom Layer w10: v1@1580,1075 v1(1580,1785)
RU0TX: P1.8 P3.3 U4.11 | length 3142.7
  Top Layer w10: P3.3 P1.8 1205,605 1205,862.31 1246.16,903.47 1333.47,903.47 1460,1030 v1(1635,1030) ; v1(1635,1745) 2625,1745 2790,1910 2865,1910 2905,1870 U4.11
  Bottom Layer w10: v1(1635,1030) v1(1635,1745)
SPI1_MISO: P13.3 U6.16 | length 595.2
  Top Layer w10: U6.16 2349.21,1429.21 v1@2370,1450
  Bottom Layer w10: P13.3 2111,1629 2231.06,1629 2231.59,1628.47 2351.53,1628.47 2370,1610 v1(2370,1460)
SPI1_MOSI: P13.2 U6.17 | length 651
  Top Layer w10: U6.17 2329.53,1509.53 v1(2330,1510)
  Bottom Layer w10: P13.2 2040,1600 2330,1600 v1(2330,1510)
SPI1_NSS: P1.24 P6.5 | length 359.4
  Top Layer w10: P6.5 1180,1360 P1.24
SPI1_NSSN: P13.5 U6.14 | length 604.3
  Top Layer w10: U6.14 2388.58,1393.58 2445,1450 2445,1470 2455,1470 2450,1465 v1(2450,1455)
  Bottom Layer w10: P13.5 2450,1685 2455,1680 2455,1480 2445,1470 2455,1470 2450,1465 v1(2450,1455)
SPI1_SCK: P13.4 U6.15 | length 567.4
  Top Layer w10: U6.15 2372.07,1362.62 2372.07,1396.21 2372.58,1396.72 2372.58,1400.21 2410,1437.63 v1@2410,1510
  Bottom Layer w10: P13.4 2195,1645 2237.69,1645 2238.21,1644.47 2390.53,1644.47 2410,1625 v1@2410,1505
  other v1: 2410,1515
SPI2_NSS: P1.26
SPI_MISO: P1.21 P6.3 | length 378
  Top Layer w10: P6.3 1021,1319 1201,1319 P1.21
SPI_MOSI: P1.19 P6.4 | length 648.3
  Top Layer w10: P6.4 899,1459 899,1279 920,1258 959.37,1258 993.37,1224 1045,1224 1067.75,1201.25 1218.75,1201.25 P1.19
SPI_SCLK: P1.23 P6.2 | length 540.2
  Top Layer w10: P6.2 1000,1240 1092,1240 1122.69,1240 1143.21,1219.47 1231.53,1219.47 1232,1219 1280,1219 1301,1240 1301,1319 P1.23
SWCLK: P7.2 U6.37 | length 966.5
  Top Layer w10: P7.2 1440,745 1505,810 2020,810 2060,850 2060,965 2095,1000 2151.18,1000 U6.37
SWCLK_030: P10.2 U7.20 | length 191.1
  Top Layer w10: U7.20 1954,1998.64 1954,1846 P10.2
SWDIO: P7.3 U6.34 | length 956.7
  Top Layer w10: P7.3 1480,820 1500,840 1940,840 v1(2010,910) ; v1(2010,1130) U6.34@2139.45,1130
  Bottom Layer w10: v1(2010,910) v1(2010,1130)
SWDIO_030: P10.3 U7.19 | length 271.2
  Top Layer w10: U7.19 1950.14,2050.43 1970,2030.58 1970,1930 P10.3
U1RX: P4.2 U3.1 U6.31 | length 1476.5
  Top Layer w10: U3.1 835,925 890,980 920,980 P4.2@940,960 ; P4.2 985,980 1105.53,1100.53 1276.79,1100.53 1277.31,1100 1375,1100 1465,1190 U6.31@2140.39,1190
U1TX: P4.3 U5.4 U6.30 | length 1759.8
  Top Layer w10: U5.4 782.36,762.36 895,875 925,875 P4.3@940,860 ; P4.3 1075,1015 1345,1015 1480,1150 v1(1920,1150) ; v1(1920,1245) 1929.84,1245 1965,1209.84 U6.30
  Bottom Layer w10: v1(1920,1150) v1(1920,1245)
U2RX: P5.2 U4.9 U6.13 | length 730.1
  Top Layer w10: U6.13 2425.55,1359.45 2435,1350 2478.55,1350 2479.55,1351 2536,1351 v1(2625,1440) ; P5.2 2660,1692.64 U4.9
  Bottom Layer w10: v1(2625,1440) 2625,1645 P5.2
U2TX: P5.3 U4.10 U6.12 | length 771.6
  Top Layer w10: U6.12 2486.18,1335 2615,1335 v1(2670,1390) ; P5.3 2765,1680 2855,1770 U4.10
  Bottom Layer w10: v1(2670,1390) 2670,1590 P5.3
U3RX: P12.8 R15.1 U6.22 U7.17 | length 3208.7
  Top Layer w10: v1(1675,2005) 1725,2055 1725,2101.61 ; R15.1@1676.73,2101.61 1725,2101.61 ; v1(1725,1415) 1735,1405 1815,1405 1860,1450 2185,1450 2231.1,1403.9 U6.22 ; v1(2750,2430) 2610,2290 2610,1920 2355,1920 2340,1935 2035,1935 2035,2025 1958.39,2101.61 U7.17 1725,2101.61
  Bottom Layer w10: v1(1675,2005) 1675,1945 1725,1895 v1(1725,1415) ; v1(2750,2430) 2775,2455 2935,2455 P12.8
U3TX: P12.7 U6.21 U7.18 | length 2882.5
  Top Layer w10: v1(1750,2005) 1750,1995 1831.02,2076.02 U7.18 1935.5,2068.32 1957.84,2068.32 2000,2026.17 2000,1935 2025,1910 2335,1910 2350,1895 2625,1895 2640,1910 2640,2275 2645.91,2275 2870.91,2500 P12.7 ; v1(1780,1460) 1795,1475 2195,1475 2250,1420 U6.21@2250,1360.24
  Bottom Layer w10: v1(1750,2005) 1750,1495 1780,1465 v1(1780,1460)
V3.3: C3.2 C4.2 P9.6 pad.0@1465,210 pad.0@1585,2100 pad.0@1650,2625 pad.1@1845,3030 R3.2 R12.2 R13.2 R15.2 R17.2 R18.2 R19.2 R20.1 R21.1 R22.1 R24.1 R28.1 R29.1 R31.2 VR1.2 | length 7375.1
  Top Layer w30: R3.2@1305,2840 R3.2 1420,2840 ; pad.0@1585,2100 R15.2 ; 1651.73,2556.73 R18.2 ; pad.1@1844,3009 1846.54,3011.54 R20.1 R22.1 R21.1 ; R18.2@2160,2565 2160,2605 ; R17.2@2240,2565 2240,2626.34 ; R19.2@2330,2565 2330,2625 ; 2695,205 2695,475 2740,520 R12.2 ; R13.2@3026.73,1180 v1(3090,1180) 3145,1235 3235,1235 P9.6
  Top Layer w50: C3.2 1420,2929.69 ; 1420,2625 1420,2738.11 1420,2840 1420,2929.69 ; C4.2 1420,2929.69 ; v1(1510,905) v1@1630,905 ; v1(1545,205) 2695,205 3065,205 ; R31.2@1581.34,745 v1@1625,745 ; R29.1@1650,2398.66 pad.0@1650,2625 ; R24.1 2181.34,2626.34 2240,2626.34 2328.66,2626.34 2330,2625
  Bottom Layer w30: 1510,2100 pad.0@1585,2100 ; v1(1820,2560) 1820,2675 1845,2700 1845,2753.95 1844,2754.95 1844,3029 pad.1@1845,3030
  Bottom Layer w50: 1510,390 v1@1510,740 ; v1(1510,905) 1510,2100 1510,2475 ; v1@3090,450 v1(3090,1180)
  other v1: 3090,230 1465,300 1545,300 3085,310 1460,370 1545,375 3080,380 3085,450 1630,740 1510,745 1635,900 1565,2500 1300,2505 1485,2605 1335,2610
V5: C1.1 C8.2 D9.2 J5.3 L1.2 pad.3@860,130 pad.4@360,1265 pad.6 R2.2 R4.1 R5.2 R6.2 R23.2 R25.1 R26.1 R27.2 R30.2 U1.4 | length 10821.1
  Top Layer w30: v1(175,755) 185.63,755 210.32,730.32 R6.2 511.65,730.32 R25.1 ; R2.2@345,1360 355,1360 407.5,1307.5 ; v1@400,320 545,320 R26.1@581.34,356.34 ; J5.3 2786.3,504.96 R30.2 ; v1(3205,1535) 3253.66,1535 R27.2
  Top Layer w50: pad.4@380,1280 407.5,1307.5 495,1395 495,1645 550,1700 965,1700 1025,1760 1025,1985 ; pad.6 860,175 ; L1.2 675.04,2059.96 795.94,1939.06 C1.1 979.06,1939.06 1025,1985 ; U1.4@806.93,2370 U1.4 806.93,2581.93 825,2600 1005,2600 1021.34,2583.66 ; R23.2 860,258.66 860,175 ; D9.2 1100,2741.34 1021.34,2741.34 1021.34,2583.66 ; C8.2 3325.31,2030.31 v1(3355,2060) ; v1(3355,130) 3350,125 860,125 860,175 ; 1021.34,2583.66 1025,2580 1025,1985
  Bottom Layer w30: v1(175,755) 185.63,755 210.32,730.32 259.68,730.32 ; J5.3 2786.3,126.3 v1(2790,130) ; v1(3205,1535) 3350,1535
  Bottom Layer w50: v1@260,1210 260,340 v1(325,275) 385,215 ; 367.5,232.5 385,215 ; pad.6 385,215 ; v1(3355,130) v1(3355,2060)
  other v1: 390,250 385,320 260,1200 175,1210 260,1275
V12: C2.2 D5.2 J1.2 P2.1 R1.2 T1.1 U1.1 | length 2178.8
  Top Layer w50: v1@302.32,2777.32 D5.2 ; R1.2 415,1500 P2.1@415,1825.47 ; P2.1 P2.1@415,1825.47 ; J1.2 605,2425 U1.1@605,2470 ; 415,1765 P2.1@415,1825.47 ; 436.54,1820.94 719.06,1820.94 T1.1
  Bottom Layer w50: v1@302.32,2777.32 295,2770 295,2330 v1(305,2330) 297.5,2322.5 J1.2 P2.1@400,1857.48
  other v1: 305,1765 460,1765 310,1850 465,1875 315,2130 430,2130 310,2230 400,2330 295,2780
V_BAT: C7.2 U2.2 U6.1 U8.8 | length 3007
  Top Layer w15: U6.1 2465,1086.18 v1(2465,1035)
  Top Layer w30: C7.2 1790,2779.69 ; 1790,2780 1790,2779.69 ; U8.8 2115,2805 2085,2775 v1(1890,2775) 1885.32,2779.69 1790,2779.69
  Bottom Layer w15: U2.2 1887.4,2262.6 1905,2245 1905,1770 2475,1770 2505,1740 2505,1045 2490,1030 2465,1030 v1(2465,1035)
  Bottom Layer w30: U2.2 1890,2640 v1(1890,2775)
VCC_030: P10.4 R29.2 U7.5 U7.16 | length 873.2
  Top Layer w20: R29.2@1660,2295 1666.83,2288.17 1831,2124 1895.17,2124 1895.68,2124.5 1927.8,2124.5 v1(2075,2124.5) U7.5@2149.5,2124.5
  Bottom Layer w20: v1(2075,2124.5) 2075,1925 P10.4
VCC_103: C13.2 C14.1 P7.4 R28.2 U6.9 U6.24 U6.36 U6.48 | length 2117.9
  Top Layer w15: U6.24 2191.73,1308.27 2293.29,1206.71 2408.27,1091.73 U6.48 ; 2335.79,1249.21 U6.9 2504.21,1249.21 2555,1300 2749.68,1300 ; 2757.03,1307.34 2749.68,1300 ; C13.2 2749.68,1300
  Top Layer w20: 2174.38,1084.91 2191.99,1102.51 2191.99,1105.41 2293.29,1206.71 2335.79,1249.21
  Top Layer w30: P7.4 1495,975 1685,975 1698.66,961.34 R28.2 1803.66,1005 2045,1005 2124.91,1084.91 2165,1084.91
VCC_1302: R24.2 U8.1 | length 123.1
  Top Layer w30: R24.2 2342.36,2743.7 U8.1
VCC_R: P1.2 P1.4 R23.1 | length 281.3
  Top Layer w50: R23.1 P1.2
  Bottom Layer w50: P1.2 P1.4
pads on no net: J3.1 J3.4 J3.6 J3.7 J3.8 J3.9 J3.10 J3.11 J4.1 J4.4 J4.6 J4.7 J4.8 J4.9 J4.10 J4.11 P1.1 P1.7 P1.11 P1.12 P1.13 P1.15 P1.16 P1.17 P1.18 P1.27 P1.28 P1.29 P1.31 P1.32 P1.33 P1.34 P1.35 P1.36 P1.37 P1.38 P1.40 P12.9 U1.0 U6.5 U6.6 U6.25 U6.26 U6.27 U6.28 U6.29 U6.32 U6.33 U6.38 U6.45 U6.46 U7.14

## Keep-outs
Keep-Out Layer:
  the board outline again, w10

## Other copper
Top Layer:
  rectangle net V5: 790,100 890,195
  rectangle net V3.3: 1270,2440 1670,2645
  rectangle net V5: 145,1170 390,1300
  rectangle net V5: 310,140 425,350
  rectangle net V12: 270,2075 495,2380
  rectangle net V12: 260,1715 500,1920
  rectangle net V3.3: 3040,210 3120,460
Bottom Layer:
  rectangle net V3.3: 1485,695 1655,950
  rectangle net V3.3: 1265,2435 1675,2645
  rectangle net V5: 145,1175 385,1300
  rectangle net V5: 310,135 425,345
  rectangle net V12: 260,2075 495,2390
  rectangle net V12: 260,1715 495,2075
  rectangle net V3.3: 1430,175 1580,405

## Silkscreen, mask and mechanical layers (free items; w line width, h text height)
Top Overlay:
  text "3.3V" at 1165,3060 h60
  text "R IO" at 3060,2770 h60
  text "C A0" at 3060,2670 h60
  text "A A2" at 3060,2570 h60
  text "RST" at 2430,2510 h60
  text "U TR" at 3060,2465 h60
  text "G C D V" at 1805,1915 h60
  text "MO MI CK NS" at 1940,1750 h32
  text "G U2R U2T" at 2520,1745 h35
  text "NS" at 755,1570 h60
  text "12V" at 65,1555 h60
  text "MO" at 755,1470 h60
  text "RS" at 2990,1470 h60
  text "MI" at 755,1370 h60
  text "CK" at 755,1270 h60
  text "5V" at 95,1245 h60
  text "U1G" at 1005,1060 h35
  text "U1R" at 1005,960 h35
  text "U1T" at 1005,860 h35
  text "G" at 1020,735 h35
  text "R" at 1020,625 h35
  text "G  C  D  V" at 1370,600 h35 r90
  text "T" at 1020,525 h35
  text "XDM-I Room V0.2 20180530" at 1345,90 h60
Bottom Overlay:
  text "VBAT" at 1850,2680 h60
  text "GND" at 1025,2580 h60 r180
  text "GND" at 310,2490 h35
  text "12V" at 310,2190 h35
  text "1P" at 295,1030 h35
  text "1N" at 305,835 h35
  text "2P" at 300,640 h35
  text "2N" at 305,440 h35
  text "IO3" at 1570,305 h60 r180
  text "G" at 1820,305 h60 r180
  text "IO1" at 3030,250 h60
  text "V5" at 2835,245 h60
  text "GND" at 3280,245 h60

## Text inside footprints (layer, text, board x,y; h text height)
J3: Top Overlay "6" at 3704.13,1143.27 h35 r270; Top Overlay "9" at 3704.13,816.1 h35 r270; Top Overlay "5" at 3334.06,761.57 h35 r270; Top Overlay "1" at 3334.06,1187.95 h35 r270
J4: Top Overlay "6" at 3704.13,2403.27 h35 r270; Top Overlay "9" at 3704.13,2076.1 h35 r270; Top Overlay "5" at 3334.06,2021.57 h35 r270; Top Overlay "1" at 3334.06,2447.95 h35 r270
P1: Top Overlay "1" at 1280,160 h35 r90; Top Overlay "2" at 1180,160 h35 r90; Top Overlay "40" at 1180,2240 h35 r90; Top Overlay "39" at 1280,2240 h35 r90
P12: Top Overlay "10" at 2965,2330 h50 r270; Top Overlay "9" at 2860,2320 h50 r270; Top Overlay "1" at 2860,2895 h50 r270; Top Overlay "2" at 2960,2900 h50 r270